# Altium PCB UL-SWAP-DAQ-3-MAIN.PcbDoc (part 2 of 2)
Units mil, origin at the board's own origin, x right, y up, seen from the top; angles counter-clockwise.
Board outline 1500 x 1860 mil, 4 copper layers (Top Layer, GND, PWR, Bottom Layer), stack 23.756 mil thick; 70 components, 75 nets, 346 pads, 55 vias.
Unrouted connection lines stored in the file: 21.
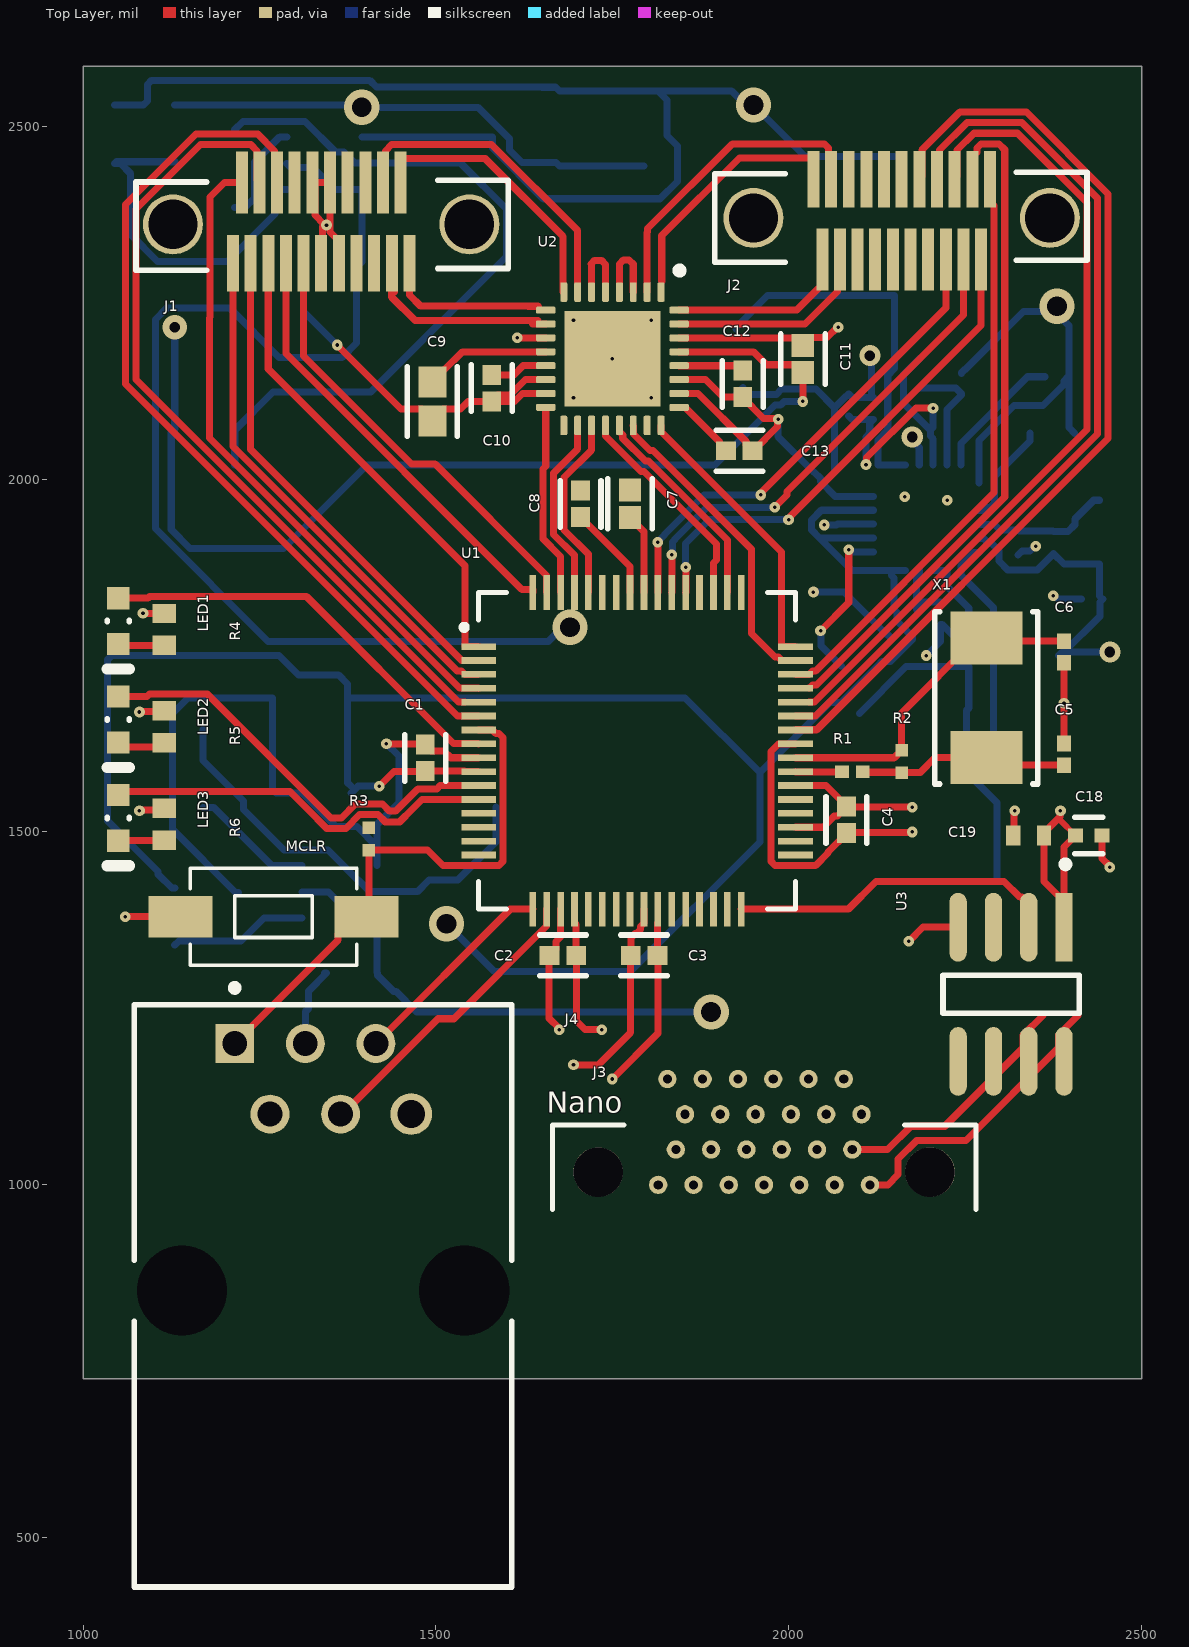
[diagram p0: Top Layer view]

## Via types
v1: diameter 15, hole 5, Top Layer to Bottom Layer, 45 vias
v2: diameter 50, hole 28, Top Layer to Bottom Layer, 6 vias
v3: diameter 30, hole 15, Top Layer to Bottom Layer, 3 vias
v4: diameter 35, hole 15, Top Layer to Bottom Layer, 1 vias

## Nets (pads, with @x,y where several pads share a name; then routed paths per layer and width w, separated by ;. In a path a pad name is that pad's centre, name@x,y a point inside that pad or via, vN(x,y) a via of type N, cw(c..) or ccw(c..) an arc to the next point about the centre after c; other vN are vias at no path point) (continued)
GND: (continued)
  Top Layer w10: v1(1060,1380) MCLR.1 ; v1(1080,1530) 1080.96,1530.96 1112.63,1530.96 R6.2 ; v1(1080,1670) 1080.73,1670.73 1114.27,1670.73 R5.2 ; v1(1085,1810) 1085.21,1809.79 1114.79,1809.79 R4.2 ; v1(1360,2190) 1450.83,2099.17 1480.19,2099.17 C9.2@1495,2084.36 ; v1(1430,1625) 1430.58,1624.42 1483.58,1624.42 1493.24,1614.76 1511.38,1614.76 1520.98,1605.16 U1.9 ; C9.2 C9.2@1495,2084.36 ; v1(1615,2200) U2.11@1655.65,2200.02 ; U2.15 1622.85,2121.3 1611.55,2110 C10.2 ; U2.14 1626.89,2140.98 1604.99,2119.08 1587.43,2119.08 1579.19,2110.84 C10.2 ; v1(1695,1170) 1730,1170 1775.58,1215.58 1775.58,1324.42 C3.2 1776.16,1350.13 1782.02,1355.98 1784.02,1355.98 1789.88,1361.84 1789.88,1366.3 1794.84,1371.26 U1.25 ; U1.20 1696.42,1371.26 1698.84,1368.84 C2.2 1699.42,1324.42 1699.42,1231.93 1711.35,1220 v1(1735,1220) ; U2.26 1844.72,2121.22 1871.4,2121.22 1939.76,2052.86 1939.76,2048.24 1948,2040 C13.2 1949.69,2040 1984.04,2074.36 1984.04,2084.04 v1(1985,2085) 1984.04,2085.96 1964.36,2085.96 1935,2115.31 C12.2 1934.71,2116.44 1906.76,2116.44 1882.22,2140.98 U2.27 ; U2.30 2009.21,2200.04 C11.2 2020,2189.68 2030.87,2200.55 2054.2,2200.55 2068.65,2215 v1(2070,2215) ; U1.41 2009.13,1624.57 1985.35,1624.57 1974.8,1614.02 1974.8,1458.5 1980.66,1452.64 2038.16,1452.64 2055.84,1470.32 2055.84,1471.62 2081.76,1497.54 C4.2 2082.57,1499.19 2174.19,1499.19 v1(2175,1500) ; v1(2170,1345) 2190.12,1365.12 U3.4 ; C19.1 2319.17,1495.83 2319.17,1529.17 v1(2320,1530) ; C5.2 C6.2 ; C18.2 2443.7,1462.65 2455,1451.35 v1(2455,1450) ; C9.2@1495,2084.36 1509.81,2099.17 1534.96,2099.17 1545.79,2110 C10.2
  Bottom Layer w10: R10.1@1045,2530 1085.36,2530 1091.22,2535.86 1091.22,2559.22 1097.08,2565.08 1406.23,2565.08 1415.65,2555.65 1669.35,2555.65 C22.1 ; R12.1 1215.92,1414.48 1126.62,1503.77 1126.62,1668.03 1148.6,1690 C27.1 1268.7,1560 C26.1 1310.74,1555 1358.14,1507.6 1388.31,1507.6 1416.3,1479.61 ; C20.2@1312.51,2300 1312.51,2237.49 v1(1360,2190) ; J4.3 1315,1245.28 1319.8,1250.08 1319.8,1274.8 1345,1300 C24.2 ; B2.1 1580.32,2485 1580.32,2469.13 1652.19,2397.25 1817.81,2397.25 1842.4,2421.84 1842.4,2472.06 1827.4,2487.06 1827.4,2537.28 C23.1@1814.68,2550 ; B1.1 1416.3,1479.61 ; v1(1430,1625) 1447.5,1607.5 1447.5,1541.53 1416.3,1510.33 1416.3,1479.61 ; C22.1@1650.32,2555 C22.1 ; v1(1985,2085) 1985,2060.1 C32.2@2029.95,2015.14 ; v1(2035,1840) 2078.5,1840 2138.66,1779.84 2140.63,1779.84 2143.5,1776.97 C29.2 ; C32.2 2035.94,2010 2044.76,2001.18 2044.76,1996.56 2065.8,1975.51 U10.11 ; v1(2050,1935) 2067.72,1935 2068.86,1936.14 U10.9 ; L4.1 2023.15,2456.85 v2(1950,2530) 1939.18,2530 1919.18,2550 C23.1@1814.68,2550 ; v1(2195,1750) 2215,1770 C30.2 2216.97,1794.25 2242.6,1768.62 2252.13,1768.62 C28.2 2255,1817.61 2224.45,1848.16 2224.45,1870.32 U10.2 U10.3 ; C35.2 2245,2150.75 2249.3,2155.05 2250.14,2155.05 2332.44,2237.35 2372.35,2237.35 v2(2380,2245) 2380,2234.18 2396.87,2217.3 C33.2 ; U10.19 2269.49,2054.85 2319.16,2104.53 2360.18,2104.53 2389.76,2134.11 2389.76,2138.73 2396.03,2145 C33.2 ; R31.1 2330.83,1898.11 2341.76,1898.11 2348.65,1905 v1(2350,1905) ; v1(2375,1835) 2376.35,1835 2381.35,1830 C31.2 ; C34.2 2396.87,2073.13 C33.2 ; C22.1 1675,2550 C23.1 C23.1@1814.68,2550
  other v1: 2390,1682.5 2224.32,1970 2164.32,1975 1695,2115 1805,2115 1750.16,2170.51 1695,2225 1805,2225
INP: D1.2 L3.2 U10.1 U10.24 | length 303.3
  Bottom Layer w10: U10.24 2262.76,1896.14 2244.13,1877.52 2244.13,1870.47 U10.1 2244.06,1863.66 2290,1817.72 D1.2 2290,1633.43 L3.2
LED1: LED1.1 U1.8 | length 597.8
  Top Layer w10: LED1.1 1092,1831.24 1094.13,1833.36 1316.94,1833.36 1525.18,1625.12 1560.32,1625.12 U1.8
LED2: LED2.1 U1.11 | length 612
  Top Layer w10: LED2.1 1090.75,1691.86 1094.13,1695.23 1176.36,1695.23 1351.59,1520 1366.18,1520 1385.79,1539.61 1424.21,1539.61 1434.39,1529.43 1442.68,1529.43 1474.35,1561.1 1501.4,1561.1 1506.09,1565.79 U1.11
LED3: LED3.1 U1.12 | length 559.5
  Top Layer w10: LED3.1 1054.63,1557.11 1293.28,1557.11 1317.88,1532.5 1345.38,1505 1372.39,1505 1392,1524.61 1418,1524.61 1428.18,1514.43 1448.89,1514.43 1466.96,1532.5 1480.56,1546.1 U1.12
MCLR: J4.1 MCLR.2 R3.1 U1.7 | length 777.8
  Top Layer w10: J4.1 1361.61,1346.89 1361.61,1355.47 1386.14,1380 MCLR.2 1405,1383.11 R3.1 1488.29,1474.25 1509.91,1452.64 1589.34,1452.64 1595.2,1458.5 1595.2,1633.71 1589.34,1639.57 1584.88,1639.57 1579.92,1644.53 U1.7
MULTI: C30.1 R27.2 U10.4 | length 95.9
  Bottom Layer w10: U10.4 2185,1863.66 2180.75,1859.41 R27.2 2191.5,1825.75 C30.1
MUXOUT_ADCIN+: U2.3 U2.4 | length 104.1
  Top Layer w10: U2.4 1760,2305 1765.54,2310.54 1773.83,2310.54 1779.69,2304.69 U2.3
MUXOUT_ADCIN-: U2.5 U2.6 | length 104.2
  Top Layer w10: U2.6 1720.63,2304.37 1720,2305 1725,2310 1734.46,2310 1740.32,2304.14 U2.5
NetC5_1: C5.1 R1.2 R2.2 X1.2 | length 298.7
  Top Layer w10: R1.2 2105.14,1584.63 2159.63,1584.63 R2.2 2186.36,1584.25 2207.46,1605.35 X1.2 2290.71,1594.65 C5.1
NetC6_1: C6.1 R2.1 U1.40 X1.1 | length 483.4
  Top Layer w10: U1.40 2149.41,1605.16 R2.1 2160,1668.43 2266.22,1774.65 X1.1 2284.29,1770.35 C6.1
NetC7_1: C7.1 U1.56 | length 114.6
  Top Layer w10: C7.1 1775,1945.32 1794.84,1925.47 U1.56
NetLED1_2: LED1.2 R4.1 | length 67.2
  Top Layer w10: LED1.2 1051.97,1764.31 1113.76,1764.31 R4.1@1115,1765.55 ; LED1.2@1050,1767.52 LED1.2@1050.62,1766.9
NetLED2_2: LED2.2 R5.1 | length 70.8
  Top Layer w10: LED2.2@1050,1622.52 1051.97,1620.55 R5.1@1120,1620.55
NetLED3_2: LED3.2 R6.1 | length 67
  Top Layer w10: LED3.2 1050.53,1488.05 R6.1 ; LED3.2@1050,1490.02 LED3.2@1051.25,1488.77
NetR1_1: R1.1 U1.39 | length 66
  Top Layer w10: U1.39 2009.65,1585.24 2075,1585.24 R1.1
NetU1_22: U1.22
NetU1_47: U1.47 U2.22 | length 444.7
  Top Layer w10: U2.22 1779.76,2075.94 1779.76,2063.94 1803.15,2040.55 1807.44,2040.55 1947.36,1900.63 1947.36,1781.21 1980.66,1747.91 1985.12,1747.91 1990.08,1742.95 U1.47
NetU1_50: U1.50 U2.21 | length 293.7
  Top Layer w10: U2.21@1760.08,2067.24 1764.76,2062.56 1764.76,2057.73 1796.94,2025.55 1801.23,2025.55 1912.95,1913.83 U1.50
NetU1_51: U1.51 U2.20 | length 306
  Top Layer w10: U2.20 1740.39,2075.94 1740.39,2060.88 1790.72,2010.55 1795.01,2010.55 1897.5,1908.07 1897.5,1885.25 1893.27,1881.02 U1.51
OUTN: D2.1 L4.2 U10.13 U10.14 | length 534.8
  Bottom Layer w10: D2.1 1925,2215 1970,2260 L4.2 2150,2156.88 2140.24,2147.12 2140.24,2069.48 2126.35,2055.6 2126.35,2020 U10.13 U10.14
PGC: J4.5 U1.17 | length 301.2
  Top Layer w10: J4.5 1605.32,1390.59 U1.17
PGD: J4.4 U1.18 | length 426.2
  Top Layer w10: J4.4 1368.12,1100.28 1503.22,1235.38 1525.62,1235.38 1656.77,1366.53 1656.77,1390.32 U1.18
Qnet: C28.1 L3.1 Q1.1 | length 504.5
  Bottom Layer w10: Q1.1 2166.18,1734.25 C28.1 2255,1675.4 2251.54,1671.94 2251.54,1584.91 2295,1541.45 L3.1
RDL: U1.61 U2.18 | length 263.1
  Top Layer w10: U1.61 1696.42,1892.07 1666.76,1921.72 1666.76,2008.28 1700.94,2042.46 U2.18
REFBUF: C9.1 U2.12 | length 179.5
  Top Layer w10: C9.1 1495,2139.53 1509.81,2154.33 1511.75,2154.33 1537.77,2180.35 U2.12
REFIN: C10.1 U2.13 | length 81.9
  Top Layer w10: C10.1 1610.7,2147.68 1623.69,2160.67 U2.13
RESET: U1.48 U2.24 | length 403.6
  Top Layer w10: U2.24 1819.06,2067.32 1989.8,1896.57 1989.8,1762.91 1990.08,1762.64 U1.48
SW1: B1.2 C25.1 L2.1 | length 621.2
  Bottom Layer w10: C25.1 1170.09,1601.26 1227.46,1543.88 1227.46,1531.98 1284.83,1474.61 1346.88,1474.61 1390.5,1430.98 1390.87,1430.98 1406.46,1415.39 B1.2 1473.78,1415.39 1490.12,1431.73 1530.94,1431.73 1585,1485.79 L2.1
SW2: B2.2 C21.2 L1.1 | length 1044.8
  Bottom Layer w10: C21.2 1226.67,2506.81 1314.5,2506.81 1358.12,2463.19 1369.57,2463.19 1385.16,2447.6 B2.2 1535.15,2447.6 1600,2382.75 1600,2315.5 1407.77,2123.27 1269.06,2123.27 1215,2069.21 L1.1
UART_TX: U1.32 U3.2 | length 454.8
  Top Layer w10: U1.32 2084.26,1390.59 2123.67,1430 2305,1430 2327.45,1407.55 2330.1,1407.55 2340,1397.65 U3.2@2340,1379.98
VDDLBYP: C12.1 U2.28 | length 93.2
  Top Layer w10: U2.28 1844.72,2160.59 1928.25,2160.59 C12.1
Vin: B1.3 B1.5 B2.3 B2.5 C20.1 C24.1 J3.5 J3.6 J3.7 | length 2327
  Bottom Layer w10: B2.5 1294.11,2441.79 1325.35,2441.79 1356.95,2410.2 B2.3 1395,2307.51 1387.49,2300 1387.49,2192.74 1367.25,2172.5 1277.93,2172.5 1207.93,2242.5 1118.61,2242.5 1102.5,2226.39 1102.5,1929.82 1262.32,1770 1659.18,1770 1679.18,1790 v2(1690,1790) ; B1.5 1348.05,1415 1379.65,1383.41 1410.89,1383.41 B1.3 1416.3,1301.19 C24.1 1417.49,1296.96 1440.2,1274.25 1443.24,1274.25 1472.49,1245 v2(1890,1245)
VREF: C35.1 R30.1 U10.17 | length 173
  Bottom Layer w10: R30.1 2236.61,2129.33 2245,2120.94 C35.1 2245,2119.25 2224.37,2098.62 U10.17
pads on no net: J1. J2. J3. J3.3 J3.4 J3.12 J3.14 J3.19 J3.20 J3.21 J3.22 J3.23 J3.24 J3.25 J4.6 J4.MH1 J4.MH2 U1.13 U1.14 U1.15 U1.16 U1.21 U1.23 U1.24 U1.27 U1.28 U1.29 U1.30 U1.31 U1.33 U1.34 U1.36 U1.37 U1.49 U1.52 U1.58 U1.59 U3.3 U3.5 U3.6 U10.12 U10.20
copper on no net: | length 11.8
  Top Layer w8: 2384.04,1517.26 2384.04,1529.04

## Polygon pours and split planes (outlines as drawn)
GND on GND (split plane): 2479.9,745.1 1020.1,745.1 1020.1,2564.9 2479.9,2564.9
+10.5V on PWR (split plane): 2479.9,1585.1 2230.1,1585.1 2230.1,2210 2229.71,2211.95 2228.6,2213.6 2003.6,2438.6 2001.95,2439.71 2000,2440.1 1750,2440.1 1748.05,2439.71 1746.4,2438.6 1456.4,2148.6 1455.29,2146.95 1454.9,2145 1454.9,1680.1 1020.1,1680.1 1020.1,2252.69 1121.4,2151.4 1123.05,2150.29 1125,2149.9 1330,2149.9 1331.95,2150.29 1333.6,2151.4 1448.6,2266.4 1449.71,2268.05 1450.1,2270 1450.1,2564.9 2479.9,2564.9
+5V on PWR (split plane): 1439.9,2272.11 1327.89,2160.1 1127.11,2160.1 1020.1,2267.11 1020.1,2564.9 1439.9,2564.9
+3.3V on PWR (split plane): 1454.9,1455 1455.29,1453.05 1456.4,1451.4 1486.4,1421.4 1488.05,1420.29 1490,1419.9 1752.89,1419.9 1774.9,1397.89 1774.9,1170 1774.9,940 1775.29,938.05 1776.4,936.4 1778.05,935.29 1780,934.9 1781.95,935.29 1782.5,935.66 1783.05,935.29 1785,934.9 2080,934.9 2081.95,935.29 2083.6,936.4 2084.71,938.05 2085.1,940 2085.1,1300 2085.1,1345 2084.71,1346.95 2083.6,1348.6 2007.21,1425 2083.6,1501.4 2084.71,1503.05 2085.1,1505 2085.1,1527.89 2132.11,1574.9 2479.9,1574.9 2479.9,745.1 1020.1,745.1 1020.1,1669.9 1454.9,1669.9
Vin on PWR (split plane): 1884.9,1535 1885.29,1533.05 1886.4,1531.4 2074.9,1342.89 2074.9,1300 2074.9,945.1 1785.1,945.1 1785.1,1170 1785.1,1400 1784.71,1401.95 1783.6,1403.6 1645.1,1542.11 1645.1,2274.9 1884.9,2274.9
-10V on PWR (split plane): 2219.9,2207.89 2219.9,1585.1 2130,1585.1 2128.05,1584.71 2126.4,1583.6 2076.4,1533.6 2075.29,1531.95 2074.9,1530 2074.9,1507.11 2000,1432.21 1895.1,1537.11 1895.1,2280 1894.71,2281.95 1893.6,2283.6 1891.95,2284.71 1890,2285.1 1640,2285.1 1638.05,2284.71 1636.4,2283.6 1635.29,2281.95 1634.9,2280 1634.9,1540 1635.29,1538.05 1636.4,1536.4 1742.69,1430.1 1492.11,1430.1 1465.1,1457.11 1465.1,1675 1465.1,2142.89 1752.11,2429.9 1997.89,2429.9

## Other copper
PWR (plane layer: these items are gaps in the copper):
  lines w10: 1005,1675 1460,1675 ; 1015,2265 1125,2155 1330,2155 1445,2270 1445,2585 ; 1755,1425 1490,1425 1460,1455 1460,1675 ; 1780,940 1780,1170 1780,1400 1640,1540 1640,2280 1890,2280 1890,1535 2080,1345 2080,1300 2080,940 1785,940 ; 2000,1425 2080,1505 2080,1530 2130,1580 2505,1580 ; 2225,1580 2225,2210 2000,2435 1750,2435 1460,2145 1460,1675

## Text inside footprints (layer, text, board x,y; h text height)
J3: Top Overlay "Nano" at 1657,1102 h30